# Altium PCB PCB1.PcbDoc
Units mm, origin at the board's own origin, x right, y up, seen from the top; angles counter-clockwise.
Board outline 37 x 18.25 mm, 2 copper layers (Top Layer, Bottom Layer); 17 components, 13 nets, 57 pads, 15 vias.
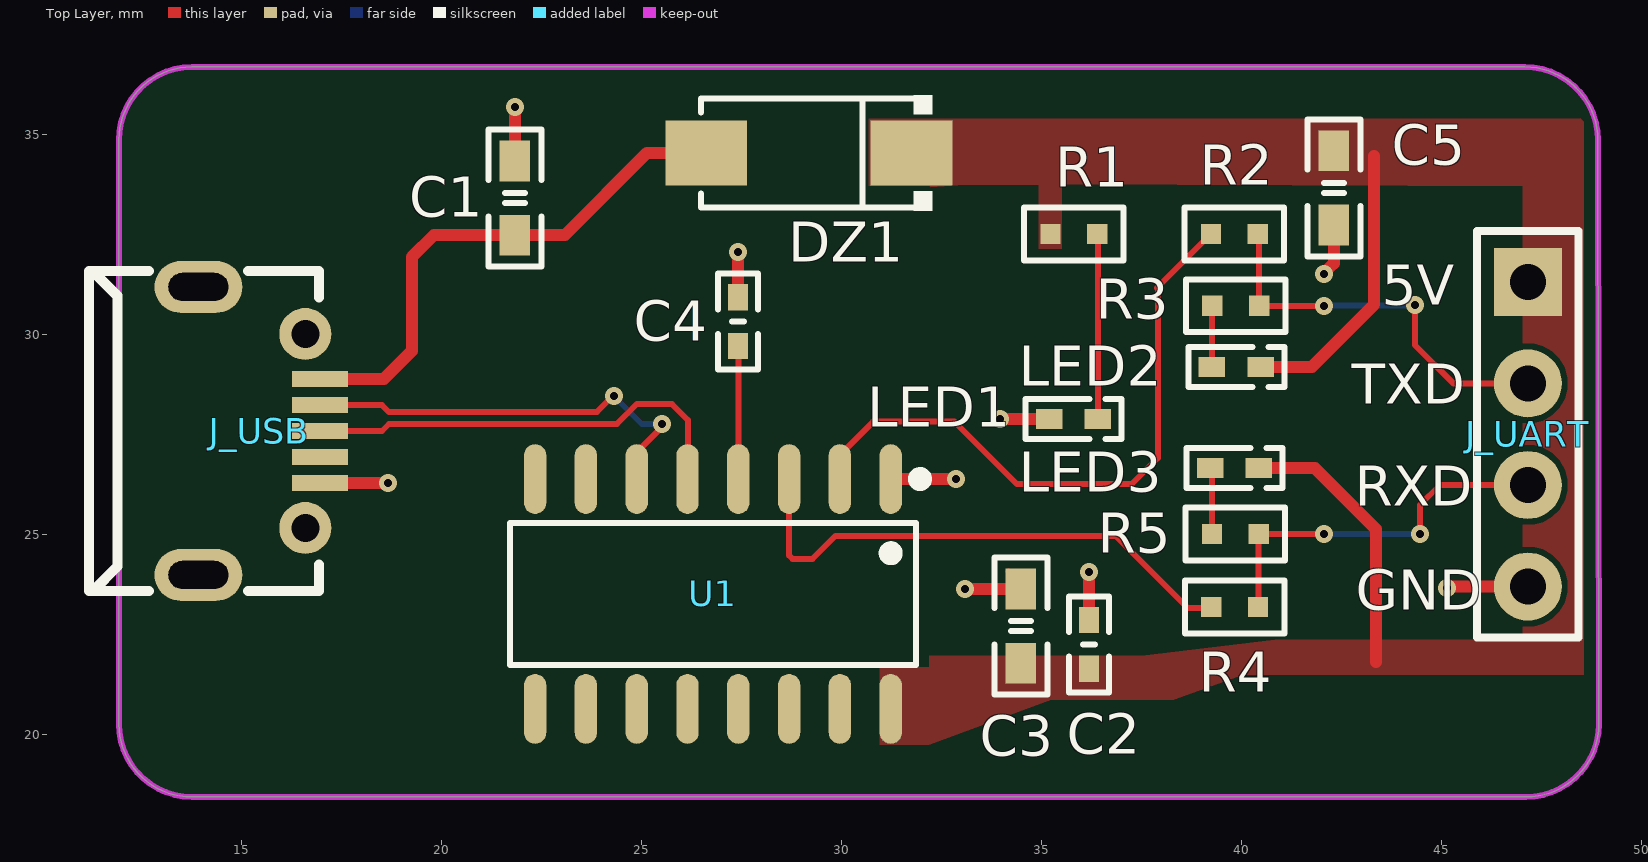
[diagram p0: Top Layer view]
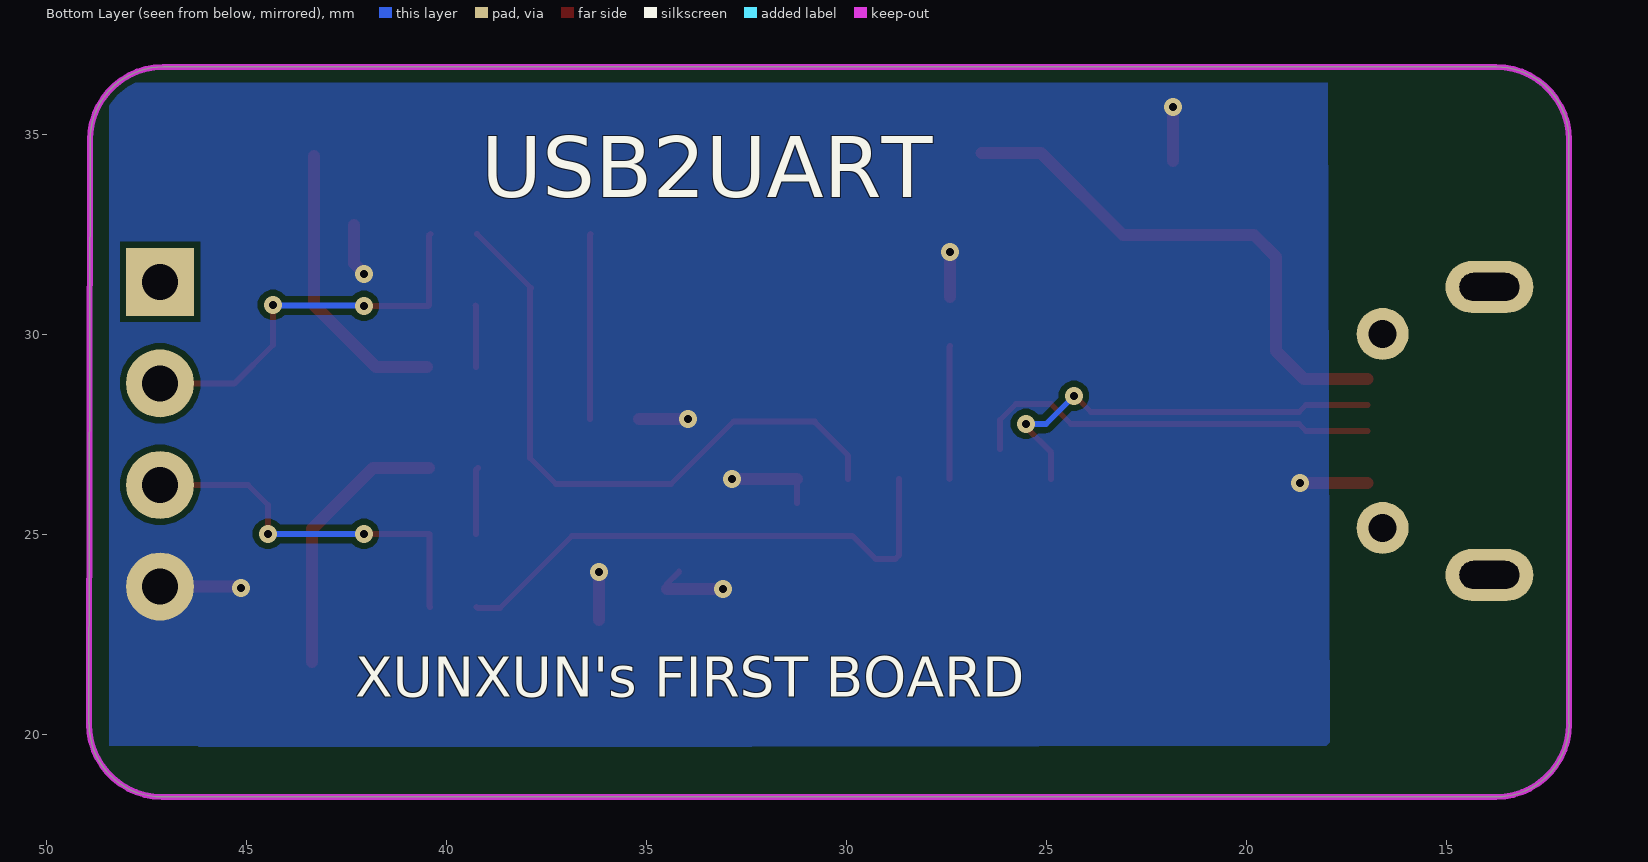
[diagram p1: Bottom Layer view, seen from below]

## Layer stack, top to bottom
Top Solder: solder mask 0.0102, Solder Resist, Dk 3.5
Top Layer: signal copper 0.0356
Dielectric 1: dielectric 0.32, FR-4, Dk 4.8
Bottom Layer: signal copper 0.0356
Bottom Solder: solder mask 0.0102, Solder Resist, Dk 3.5

## Board outline
13.75,18.45 cw(c13.75,20.275) 11.925,20.275 11.926,20.275 11.926,34.875 cw(c13.751,34.875) 13.751,36.7 47.075,36.7 cw(c47.075,34.875) 48.9,34.875 48.927,20.275 48.925,20.275 cw(c47.1,20.275) 47.1,18.45

## Design rules (kind name [scope] priority, off if disabled: settings)
Clearance [All] p1: gap=0.15 ignorepadtopadclearanceinfootprint=FALSE
DiffPairsRouting [All] p1: maxlimit=1 minlimit=0.15 mostfreqgap=0.15 toplayer_minwidth=0.15 toplayer_maxwidth=1 toplayer_prefwidth=0.15 bottomlayer_minwidth=0.15 bottomlayer_maxwidth=1 bottomlayer_prefwidth=0.15 maxuncoupledlength=12.7
MinimumSolderMaskSliver [All] p1: minsoldermaskwidth=0
PolygonConnect [All] p1: connectstyle=Direct reliefconductorwidth=0.254 reliefentries=4 polygonreliefangle="90 Angle" airgapwidth=0.254
RoutingVias [All] p1: holewidth=0.3 width=0.6 viastyle="Through Hole" minholewidth=0.2 minwidth=0.45 maxholewidth=1 maxwidth=2
SilkToSilkClearance [All] p1: silktosilkclearance=0.1
SilkToSolderMaskClearance [IsPad] p1: minsilkscreentomaskgap=0.1 clearancetoexposedcopper=TRUE
SolderMaskExpansion [All] p1: expansion=0.102 istentingtop=FALSE
Width [All] p1: maxlimit=1 minlimit=0.1 preferedwidth=0.15
26 further rules are at their usual default settings.

## Classes and differential pairs
differential pair USB: +USB_P -USB_N

## Components (designator, comment, footprint, x,y, rotation, side; value= is the part's Value field where it differs from the comment)
C1 "10uF" "C 0603_M" 21.826,33.423 r270 top
C2 "0.1uF" "C 0402_M" 36.176,22.266 r90 top
C3 "10uF" "C 0603_M" 34.476,22.723 r90 top
C4 "0.1uF" "C 0402_M" 27.401,30.335 r90 top
C5 "10uF" "C 0603_M" 42.301,33.677 r270 top
DZ1 "1N4007(D0-214AC)" "D SMA(DO-214AC)" 29.176,34.55 r180 top
J_UART "pin4" HDR2.54-LI-4P 47.15,27.52 r270 top
J_USB "CON4" MICROUSB_C404969 15.436,27.6 r270 top
LED1 "GREEN" "D 0402" 35.791,27.9 r180 top
LED2 "BLUE" "D 0402" 39.86,29.2 r180 top
LED3 "BLUE" "D 0402" 39.816,26.675 r180 top
R1 "0.5K" "R 0402R" 35.801,32.525 r0 top
R2 "470" "R 0402R" 39.81,32.525 r0 top
R3 "0.5K" "R 0402R" 39.846,30.733 r180 top
R4 "470" "R 0402R" 39.817,23.2 r0 top
R5 "0.5K" "R 0402R" 39.835,25.025 r180 top
U1 "CH340C" SOP-16_150MIL 26.776,23.525 r180 top

## Footprints (in the part's own frame and the unit in brackets; to place one, negate y for a bottom-side part, rotate by r counter-clockwise, add the part's x,y. Pads: shape width x height; smd on the part's side, far side on the other; paste and mask are expansions set on the pad)
"C 0402_M" [mil] "无极性贴片电容"
  rect 26x20 smd: 1(-24,0) 2(24,0)
  silkscreen extent -47,-20 47,20, body extent -20,-10 20,10, height 21
"C 0603_M" [mil] "无极性贴片电容"
  rect 40x30 smd: 1(-36.5,0) 2(36.5,0)
  silkscreen extent -68,-26 68,26, body extent -31,-16 31,16, height 32
"D 0402" [mil]
  rect 26x20 smd: 1(-24,0) 2(24,0)
  silkscreen extent -47,-20 47,20, body extent -20,-10 20,10, height 21
"D SMA(DO-214AC)" [mm]
  rect 2.046x1.62 smd: 1(-2.565,0) 2(2.565,0)
  silkscreen extent -3.08,-1.44 2.7,1.44, body extent -2.56,-1.33 2.64,1.27, height 2.4
HDR2.54-LI-4P [mm] "排针，4脚"
  rect 1.7x1.7 hole 0.9: 1(-3.81,0)
  round 1.7 hole 0.9: 2(-1.27,0) 3(1.27,0) 4(3.81,0)
  silkscreen extent -5.08,-1.27 5.08,1.27, body extent -5.08,-1.27 5.08,1.27, height 8.5
MICROUSB_C404969 [mm]
  rect 0.4x1.4 smd: 1(-1.3,1.521) 2(-0.65,1.521) 3(0,1.521) 4(0.65,1.521) 5(1.3,1.521)
  round 1.3 hole 0.7: 6(2.425,1.149) 9(-2.425,1.149)
  oval 1.3x2.2 hole 0.7 slot 1.5 at 90 deg: 7(3.6,-1.521) 8(-3.6,-1.521)
  silkscreen extent -4,-4.26 4,1.49
"R 0402R" [mil]
  rect 20x20 smd: 1(-23,0) 2(23,0)
  silkscreen extent -49,-26 49,26, body extent -20,-10 20,10, height 14
SOP-16_150MIL [mm]
  oval 0.56x1.745 smd: 1(-4.445,-2.873) 2(-3.175,-2.873) 3(-1.905,-2.873) 4(-0.635,-2.873) 5(0.635,-2.873) 6(1.905,-2.873) 7(3.175,-2.873) 8(4.445,-2.873) 9(4.445,2.873) 10(3.175,2.873) 11(1.905,2.873) 12(0.635,2.873) 13(-0.635,2.873) 14(-1.905,2.873) 15(-3.175,2.873) 16(-4.445,2.873)
  silkscreen extent -5.33,-3.02 5.08,1.77, body extent -5,-3.11 5,3.16, height 1.5

## Part data
C1 C2 C3 C4 C5: library part C, "无极性贴片电容", BOM名称=无极性贴片电容, 学习资源=www.ooocke.com, 版权归属=源创客
DZ1: library part DZ, "稳压二极管", BOM名称=3V/0.5W稳压管, 学习资源=www.ooocke.com, 版权归属=源创客
J_USB: library part MicroUSB_5P
LED1 LED2 LED3: library part LED-SMD, "贴片LED", BOM名称=贴片LED, 学习资源=www.ooocke.com, 版权归属=源创客
R1 R2 R3 R4 R5: library part R, "贴片电阻"
U1: "CH340 是一个 USB 总线的转接芯片，实现 USB 转串口或者 USB 转打印口。"

## Via types
v1: diameter 0.45, hole 0.2, Top Layer to Bottom Layer, 15 vias

## Nets (pads, with @x,y where several pads share a name; then routed paths per layer and width w, separated by ;. In a path a pad name is that pad's centre, name@x,y a point inside that pad or via, vN(x,y) a via of type N, cw(c..) or ccw(c..) an arc to the next point about the centre after c; other vN are vias at no path point)
GND: C1.1 C2.2 C3.2 C4.2 C5.2 J_UART.4 J_USB.5 LED1.2 U1.1 | length 14.2
  Top Layer w0.15: U1.1@31.221,25.805 U1.1 ; C3.2@34.17,24.083 34.476,23.777 C3.2
  Top Layer w0.3: J_USB.5 v1(18.651,26.3) ; C1.1 v1(21.826,35.7) ; C4.2 v1(27.401,32.075) ; U1.1 v1(32.848,26.398) ; v1(33.076,23.65) C3.2 ; v1(33.951,27.9) LED1.2 ; C2.2 v1(36.176,24.075) ; v1(42.051,31.525) 42.051,31.542 42.301,31.792 C5.2 ; v1(45.125,23.675) 45.166,23.675 45.201,23.71 J_UART.4
NetC4_1: C4.1 U1.4 | length 3.3
  Top Layer w0.15: C4.1 27.411,29.715 U1.4
NetLED1_1: LED1.1 R1.2 | length 4.6
  Top Layer w0.15: R1.2 36.401,32.51 LED1.1
NetLED2_2: LED2.2 R3.2 | length 1.5
  Top Layer w0.15: LED2.2 39.251,30.722 R3.2
NetLED3_2: LED3.2 R5.2 | length 1.7
  Top Layer w0.15: LED3.2 39.251,26.631 R5.2
RXD: R4.1 U1.3 | length 13.5
  Top Layer w0.15: U1.3 28.681,24.488 28.769,24.4 29.26,24.4 29.835,24.975 36.851,24.975 38.651,23.175 39.207,23.175 R4.1
RXD_EX: J_UART.3 R4.2 R5.1 | length 9.5
  Top Layer w0.15: R4.2 40.419,23.219 R5.1 v1(42.051,25.025) ; v1(44.451,25.025) 44.451,25.749 44.952,26.25 J_UART.3
  Bottom Layer w0.15: v1(42.051,25.025) v1(44.451,25.025)
TXD: R2.1 U1.2 | length 16
  Top Layer w0.15: U1.2 29.951,26.99 30.776,27.815 30.776,27.838 32.814,27.838 34.376,26.275 37.251,26.275 37.901,26.925 37.901,31.15 37.876,31.175 R2.1
TXD_EX: J_UART.2 R2.2 R3.1 | length 9.9
  Top Layer w0.15: R2.2 40.43,32.49 R3.1 40.438,30.725 v1(42.051,30.725) ; v1(44.326,30.75) 44.326,29.75 45.286,28.79 J_UART.2
  Bottom Layer w0.15: v1(42.051,30.725) 42.063,30.738 44.313,30.738 v1(44.326,30.75)
USB_N: J_USB.2 U1.6 | length 10.7
  Top Layer w0.15: J_USB.2 18.501,28.25 18.676,28.075 23.876,28.075 v1@24.288,28.488 ; U1.6 24.871,27.068 25.501,27.698 v1(25.501,27.775)
  Bottom Layer w0.15: v1(24.301,28.475) 25.001,27.775 v1(25.501,27.775)
USB_P: J_USB.3 U1.5 | length 10.4
  Top Layer w0.15: J_USB.3 18.502,27.6 18.677,27.775 24.376,27.775 24.876,28.275 25.751,28.275 26.151,27.875 U1.5@26.151,27.15
VCC5V: C2.1 C3.1 C5.1 DZ1.1 J_UART.1 LED2.1 LED3.1 R1.1 U1.16 | length 14.1
  Top Layer w0.3: LED3.1 41.826,26.675 43.351,25.15 43.351,21.825 ; LED2.1 41.751,29.2 43.301,30.75 43.301,34.475
VDDUSB: C1.2 DZ1.2 J_USB.1 | length 13.4
  Top Layer w0.3: J_USB.1 18.551,28.9 19.251,29.6 19.251,31.95 19.797,32.496 C1.2 23.072,32.496 25.126,34.55 DZ1.2
pads on no net: J_USB.4 J_USB.6 J_USB.7 J_USB.8 J_USB.9 U1.7 U1.8 U1.9 U1.10 U1.11 U1.12 U1.13 U1.14 U1.15

## Polygon pours and split planes (outlines as drawn)
GND on Bottom Layer "GND_PAVE" (solid, remove dead copper, pour order 2): 17.906,19.725 32.351,19.7 38.076,19.7 46.176,19.7 46.201,19.725 48.418,19.725 48.418,21.075 48.418,31.175 48.418,32.164 48.418,36.3 43.651,36.3 19.626,36.3 17.953,36.3
VCC5V on Top Layer "VCC5V_PAVE" (solid, remove dead copper, pour order 0): 48.55,35.416 45.676,35.4 30.676,35.4 30.676,33.731 32.179,33.731 32.179,21.698 30.943,21.698 30.943,19.75 32.179,19.75 35.238,20.884 38.301,20.884 40.029,21.502 48.55,21.502

## Keep-outs
Keep-Out Layer:
  the board outline again, w0.15

## Other copper
Top Layer:
  pour cut-out: 33.062,33.75 34.926,33.75 34.926,32.15 35.501,32.15 35.501,33.763 47.026,33.718 47.026,22.375 40.826,22.375 37.501,21.975 32.179,21.975 32.179,33.693

## Silkscreen, mask and mechanical layers (free items; w line width, h text height)
Top Overlay:
  text "5V" at 43.5,30.75 h1
  text "TXD" at 42.75,28.275 h1
  text "RXD" at 42.825,25.725 h1
  text "GND" at 42.85,23.125 h1
Bottom Overlay:
  text "USB2UART" at 39.124,33.44 h1.52
  text "XUNXUN's FIRST BOARD" at 42.271,20.954 h1